# Altium PCB Product_Sorter.PcbDoc
Units mm, origin at the board's own origin, x right, y up, seen from the top; angles counter-clockwise.
Board outline 134 x 92 mm, 2 copper layers (Top Layer, Bottom Layer); 52 components, 48 nets, 220 pads, 87 vias.
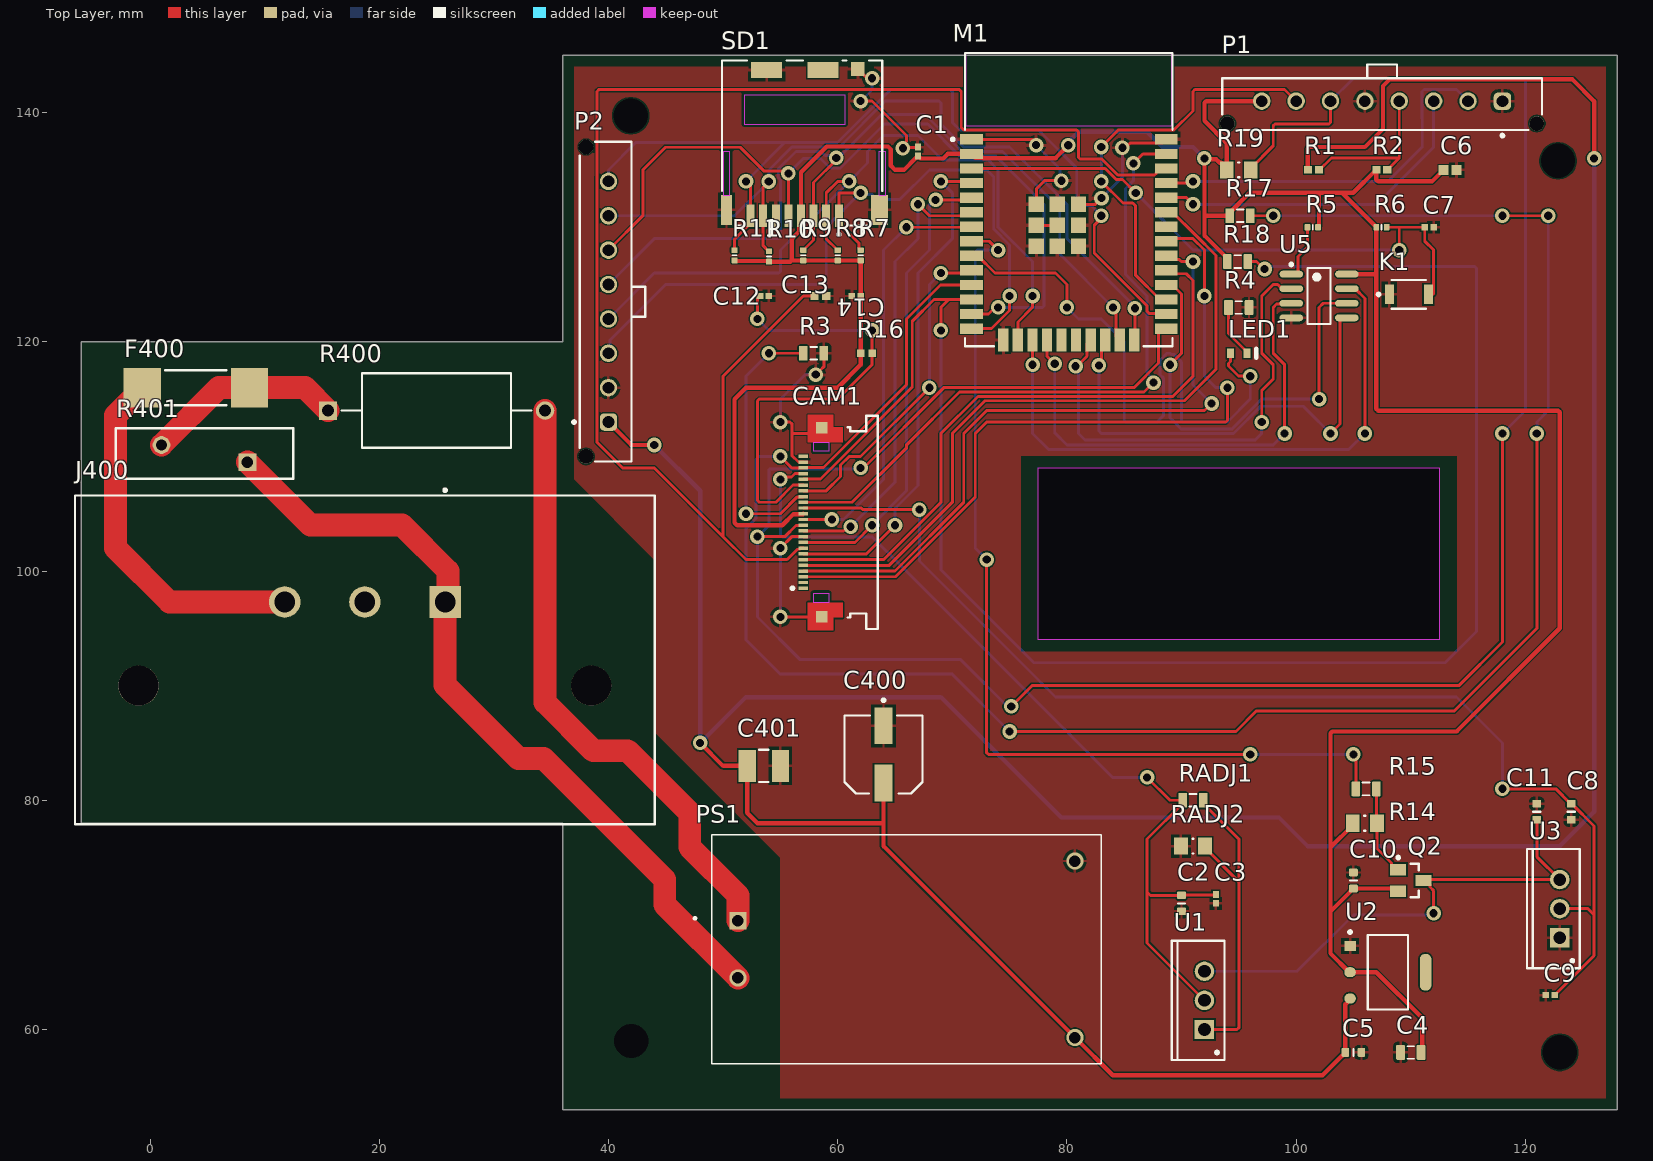
[diagram p0: Top Layer view]
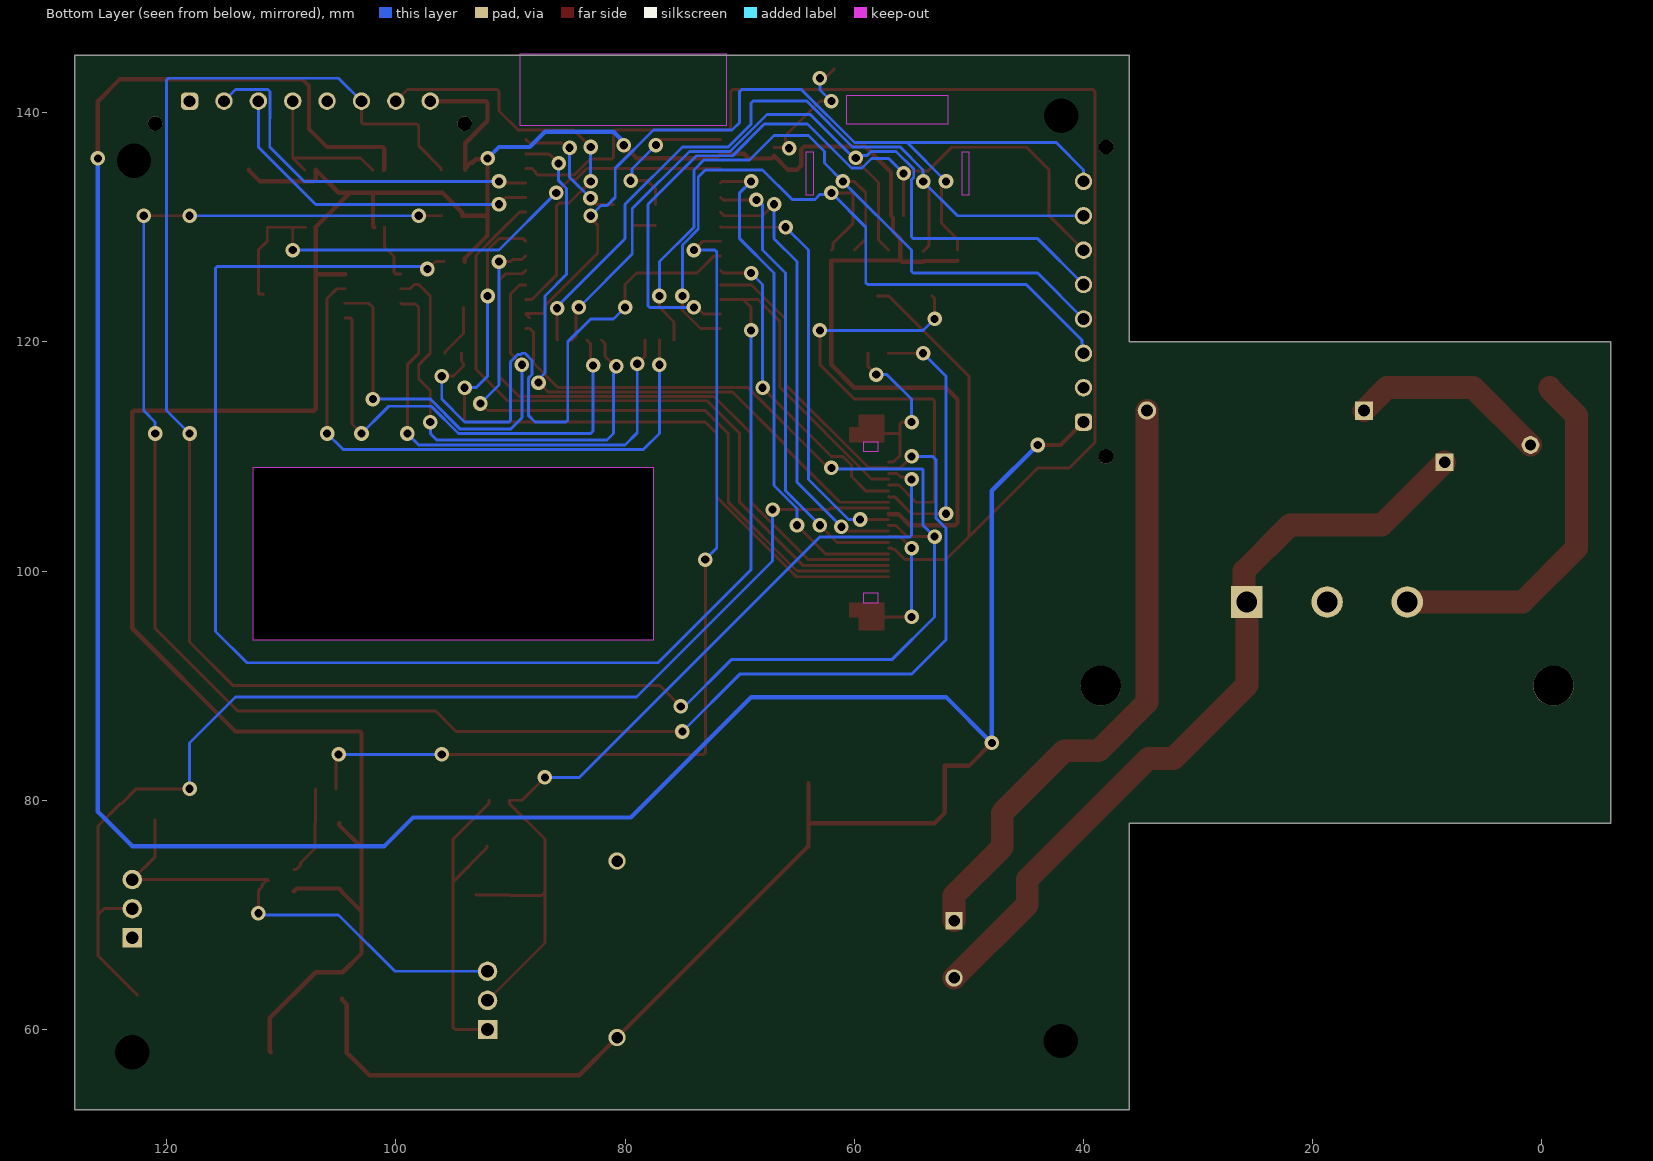
[diagram p1: Bottom Layer view, seen from below]
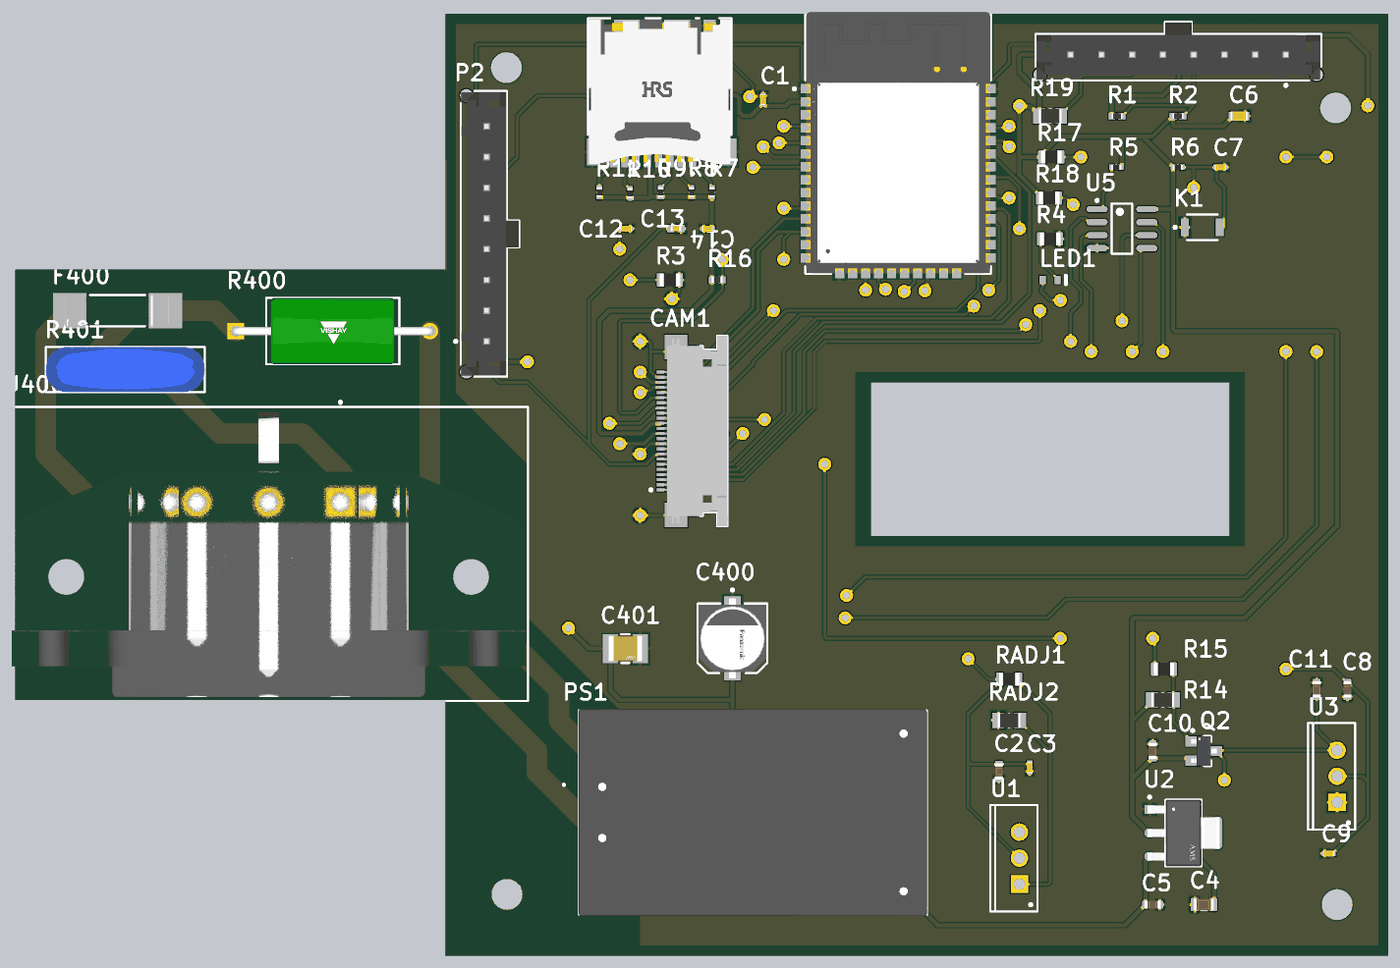
[diagram p2: 3D render of the assembled board from above, using the file's embedded part models]

## Layer stack, top to bottom
Top Solder: solder mask 0.0102, Solder Resist, Dk 3.5
Top Layer: signal copper 0.0356
Dielectric 1: dielectric 0.32, FR-4, Dk 4.8
Bottom Layer: signal copper 0.0356
Bottom Solder: solder mask 0.0102, Solder Resist, Dk 3.5

## Board outline
-6,120 -6,78 36,78 36,53 128,53 128,145 36,145 36,120
cut-out: 77.5,109 112.5,109 112.5,94 77.5,94

## Design rules (kind name [scope] priority, off if disabled: settings)
Clearance Clearance_1 [OnMid vs OnMid] p1: gap=0.127 ignorepadtopadclearanceinfootprint=FALSE sourcerule=37 cellrowname=All cellrowtype=0 cellcolname=All cellcoltype=0 innerlayers=TRUE
Clearance Clearance_2 [(ExistsOnLayer('Top Layer') Or ExistsOnLayer('Bottom Layer')) vs (ExistsOnLayer('Top Layer') Or ExistsOnLayer('Bottom Layer'))] p2: gap=0.127 ignorepadtopadclearanceinfootprint=FALSE sourcerule=37 cellrowname=All cellrowtype=0 cellcolname=All cellcoltype=0 outerlayers=TRUE
Clearance [All] p3: gap=0.254 ignorepadtopadclearanceinfootprint=FALSE ismatrix=TRUE
PolygonConnect [All] p1: connectstyle=Relief reliefconductorwidth=0.254 reliefentries=4 polygonreliefangle="90 Angle" airgapwidth=0.254
RoutingVias [All] p1: holewidth=0.711 width=1.27 viastyle="Through Hole" minholewidth=0.711 minwidth=1.27 maxholewidth=0.711 maxwidth=1.27
SMDNeckDown [All] p1: percent=50.000
SolderMaskExpansion [All] p1: expansion=0.102 istentingtop=FALSE
Width [All] p1: maxlimit=3 minlimit=0.254 preferedwidth=0.254 minimp=50.000000 maximp=50.000000 favimp=50.000000
30 further rules are at their usual default settings.

## Classes and differential pairs
component class U_Ram: C6 C? R5 R? U5
component class "U_power supply": C2 C3 C4 C5 C8 C9 C10 C11 C400 C401 F400 J400 PS1 Q2 R14 R15 R400 R401 RADJ1 RADJ2 U1 U2 U3
component class U_ESP32-Cam: C1 C7 C12 C13 C14 CAM1 K1 K? LED1 M1 P1 P2 R1 R2 R3 R4 R6 R7 R8 R9 R10 R11 R16 R17 R18 R19 SD1

## Components (designator, comment, footprint, x,y, rotation, side; value= is the part's Value field where it differs from the comment)
C1 "Capacitor 0.1 uF +/- 5% 16 V 0402" CAPC1005X56X25LL10T15 67,136.61 r90 top value=100nF
C2 "Capacitor 10µF +/-20% 10V 0603" CAPC0603(1608)100_L 90,71 r270 top value=10µF
C3 "Capacitor 0.1 uF +/- 5% 16 V 0402" CAPC1005X56X25LL10T15 93,71.39 r270 top value=100nF
C4 "Capacitor 100µF +/-20% 6.3V 0805" CAPC0805(2012)145_L 110,58 r180 top value=100µF
C5 "Capacitor 10µF +/-20% 10V 0603" CAPC0603(1608)100_L 105,58 r0 top value=10µF
C6 "Capacitor 1 uF +/- 10% 25 V 0603" CAPC1608X90X40LL10T20 113.425,135 r0 top value=1µF
C7 "Capacitor 0.1 uF +/- 5% 16 V 0402" CAPC1005X56X25LL10T15 111.61,130 r0 top value=100nF
C8 "Capacitor 10µF +/-20% 10V 0603" CAPC0603(1608)100_L 124,79 r270 top value=10µF
C9 "Capacitor 0.1 uF +/- 5% 16 V 0402" CAPC1005X56X25LL10T15 122.17,63 r180 top value=100nF
C10 "Capacitor 10µF +/-20% 10V 0603" CAPC0603(1608)100_L 105,73 r270 top value=10µF
C11 "Capacitor 10µF +/-20% 10V 0603" CAPC0603(1608)100_L 121,79 r90 top value=10µF
C12 "Capacitor 0.1 uF +/- 5% 16 V 0402" CAPC1005X56X25LL10T15 53.61,124 r0 top value=100nF
C13 "Capacitor 10 pF +/- 5% 50 V 0402" CAPC1005X55X25ML05T05 58.49,124 r0 top value=10pF
C14 "Capacitor 0.1 uF +/- 5% 16 V 0402" CAPC1005X56X25LL10T15 61.61,124 r180 top value=100nF
C400 "EEE-FK1A151P" FP-FKD-MFG 64,84 r270 top
C401 "12101C105KAZ2A" FP-1210-L_3_3_0_4-W_2_5_0-IPC_B 53.55,83 r0 top
CAM1 "52435-2471" MOLX-52435-2471 57.762,104.25 r90 top
F400 "0456030.ER" FP-0456-MFG 4,116 r0 top value=0.00132Ω
J400 "703W-00/52" FP-703W-00-52-MFG 18.75,92.25 r0 top
K1 "B3U-1000P" OMRON-B3U-1000_V 109.837,124.137 r0 top
LED1 "TLMS1100-GS08" VISH-TLMX1100_V 95,119 r0 top
M1 "ESP32-WROOM-32" FP-ESP32-WROOM-32-MFG 80.165,132.405 r0 top
P1 "66200811122" 66200811122 107.5,140.745 r0 top
P2 "66200811122" 66200811122 39.745,123.5 r270 top
PS1 "HLK-PM01" CONV_HLK-PM01 66,67 r0 top
Q2 "FDN340P" FAIR-SSOT3L-3_V 110,73 r0 top
R1 "Resistor 0R 0402 63 mW" RESC1005X40X25ML05T10 101.525,135 r0 top value=0R
R2 "Resistor 0R 0402 63 mW" RESC1005X40X25ML05T10 107.475,135 r0 top value=0R
R3 "Resistor 1K +/-5% 0805 125 mW" RESC0805(2012)_L 57.9,119 r0 top value=1k
R4 "Resistor 1K +/-5% 0805 125 mW" RESC0805(2012)_L 95,123 r0 top value=1k
R5 "Resistor 10K  +/-1 % 0402 63 mW" RESC0402(1005)_L 101.45,130 r180 top value=10k
R6 "Resistor 10K  +/-1 % 0402 63 mW" RESC0402(1005)_L 107.45,130 r0 top value=10k
R7 "Resistor 47K5 +/-1 % 0402 63 mW" RESC0402(1005)_L 62,127.55 r90 top value=47.5k
R8 "Resistor 47K5 +/-1 % 0402 63 mW" RESC0402(1005)_L 60,127.55 r90 top value=47.5k
R9 "Resistor 47K5 +/-1 % 0402 63 mW" RESC0402(1005)_L 57,127.55 r90 top value=47.5k
R10 "Resistor 47K5 +/-1 % 0402 63 mW" RESC0402(1005)_L 54,127.45 r90 top value=47.5k
R11 "Resistor 47K5 +/-1 % 0402 63 mW" RESC0402(1005)_L 51,127.55 r90 top value=47.5k
R14 "Resistor 10k +/-1% 0805 125 mW" RESC2013X50X35ML15T15 106,78 r0 top value=10k
R15 "Resistor 1K +/-5% 0805 125 mW" RESC0805(2012)_L 106.1,81 r180 top value=1k
R16 "Resistor 4k7 +/-1% 0402 100 mW" RESC1005X40X25ML05T05 62.5,119 r0 top value=4.7k
R17 "Resistor 4R7  +/-5 % 0805 125 mW" RESC0805(2012)_L 95.11,131 r0 top value=4.7
R18 "Resistor 4R7  +/-5 % 0805 125 mW" RESC0805(2012)_L 94.9,127 r0 top value=4.7
R19 "Resistor 10k +/-1% 0805 125 mW" RESC2013X50X35ML15T15 95,135 r0 top value=10k
R400 "RWM04103R90JR15E1" FP-RWM0410-MFG 25,114 r0 top
R401 "B72214S0300K101" FP-B72214S0300K101-MFG 4.75,110.25 r180 top value=4950pF
RADJ1 "Resistor 1K +/-5% 0805 125 mW" RESC0805(2012)_L 91,80 r0 top value=8K
RADJ2 "Resistor 10k +/-1% 0805 125 mW" RESC2013X50X35ML15T15 91,76 r0 top value=10k
SD1 "DM3CS-SF" FP-DM3CS-SF-MFG 56.9,137.35 r0 top
U1 "LM317T" TO-220 92,62.54 r90 top
U2 "AMS1117-3.3" FP-AMS1117-IPC_C 108,65 r0 top
U3 "LM317T" TO-220 123,70.54 r90 top
U5 "23LC512-I/SN" MCHP-SOIC-SN8_N 102,124 r0 top

## Footprints (in the part's own frame and the unit in brackets; to place one, negate y for a bottom-side part, rotate by r counter-clockwise, add the part's x,y. Pads: shape width x height; smd on the part's side, far side on the other; paste and mask are expansions set on the pad)
66200811122 [mm] "3.00mm Male Single Row Vertical Header, 8p"
  rrect50% 1.52x1.52 hole 1.02: 1(10.5,0.255)
  round 1.52 hole 1.02: 2(7.5,0.255) 3(4.5,0.255) 4(1.5,0.255) 5(-1.5,0.255) 6(-4.5,0.255) 7(-7.5,0.255) 8(-10.5,0.255)
  round 1.27 hole 1.27 unplated: MH1(-13.5,-1.705) MH2(13.5,-1.705)
  silkscreen extent -13.95,-2.87 13.95,3.46, body extent -13.82,-2.19 13.83,3.38, height 9.93
CAPC0603(1608)100_L [mm] "Chip Capacitor, Body 1.6x0.8mm, Height 1.0mm, IPC High Density"
  rrect25% 0.66x0.76 smd: 1(-0.7,0) 2(0.7,0)
  silkscreen extent 0,-0.3 0,0.3, body extent -0.8,-0.4 0.8,0.4, height 0.95
CAPC0805(2012)145_L [mm] "Chip Capacitor, Body 2.0x1.2mm, Height 1.45mm, IPC High Density"
  rrect25% 0.76x1.3 smd: 1(-0.9,0) 2(0.89,0)
  silkscreen extent -0.3,-0.55 0.3,0.55, body extent -1,-0.6 1,0.6, height 1.45
CAPC1005X55X25ML05T05 [mm] "Chip Capacitor, 2-Leads, Body 1.05x0.55mm, IPC Low Density"
  rect 0.72x0.72 smd: 1(-0.51,0) 2(0.51,0)
  body extent -0.53,-0.28 0.53,0.28, height 0.55
CAPC1005X56X25LL10T15 [mm] "Chip Capacitor, 2-Leads, Body 1.10x0.60mm, IPC High Density"
  rect 0.58x0.54 smd: 1(-0.39,0) 2(0.39,0)
  body extent -0.55,-0.3 0.55,0.3, height 0.56
CAPC1608X90X40LL10T20 [mm] "Chip Capacitor, 2-Leads, Body 1.70x0.90mm, IPC High Density"
  rect 0.85x0.85 smd: 1(-0.575,0) 2(0.575,0)
  body extent -0.85,-0.45 0.85,0.45, height 0.9
CONV_HLK-PM01 [mm]
  rect 1.508x1.508 / inner round 1.508 / far side rect 1.508x1.508 hole 1: 1(-14.7,2.5)
  round 1.508 hole 1: 2(-14.7,-2.5) 3(14.7,7.7) 4(14.7,-7.7)
  silkscreen extent -18.55,-10 17,10, body extent -17,-10.1 17,10.1, height 15
FAIR-SSOT3L-3_V [mm] "SOT23, 3-Leads, Body 2.92x1.4mm, Pitch 0.95mm"
  rect 1.4x1 smd: 1(-1.1,0.95) 2(-1.1,-0.95) 3(1.1,0)
  silkscreen extent -1.22,-1.46 0.7,2.12, body extent -1.26,-1.46 1.26,1.46, height 1.12
FP-0456-MFG [mm]
  rect 3.25x3.43 smd paste+0 mask+0: 1(-4.675,0) 2(4.675,0)
  silkscreen extent -2.67,-1.52 2.68,1.52, body extent -6.4,-1.82 6.4,1.82, height 0.25
FP-703W-00-52-MFG [mm]
  rect 2.75x2.75 hole 1.8 paste-2539.97 mask+0: 1(7,5.05)
  round 2.75 hole 1.8 paste-2539.97 mask+0: 2(0,5.05) 3(-7,5.05)
  round 3.5 hole 3.5 unplated paste-2539.97 mask+0: ""(-19.75,-2.25) ""(19.75,-2.25)
  silkscreen extent -25.3,-14.35 25.3,14.92, body extent -25.4,-14.45 25.4,14.45, height 0.25
FP-1210-L_3_3_0_4-W_2_5_0-IPC_B [mm]
  rect 1.503x2.804 smd paste+0 mask+0: 1(-1.45,0) 2(1.45,0)
  silkscreen extent -0.4,-1.4 0.4,1.4, body extent -2.45,-1.65 2.45,1.65, height 0.25
FP-AMS1117-IPC_C [mm]
  rect 1.004x0.872 smd paste+0 mask+0: 1(-3.295,2.29)
  rrect100% 1.004x0.872 smd paste+0 mask+0: 2(-3.295,0) 3(-3.295,-2.29)
  rrect87% 1.004x3.182 smd paste+0 mask+0: 4(3.295,0)
  silkscreen extent -3.42,-3.25 1.75,3.62, body extent -3.9,-3.35 3.9,3.35, height 0.25
FP-B72214S0300K101-MFG [mm]
  rect 1.55x1.55 hole 1 paste-2539.97 mask+0: 1(-3.75,0.75)
  round 1.55 hole 1 paste-2539.97 mask+0: 2(3.75,-0.75)
  silkscreen extent -7.75,-2.2 7.75,2.2, body extent -7.85,-2.3 7.85,2.3, height 0.25
FP-DM3CS-SF-MFG [mm]
  rect 0.7x2 smd paste+0 mask+0: 1(3.2,-6.35) 2(2.1,-6.35) 3(1,-6.35) 4(-0.1,-6.35) 5(-1.2,-6.35) 6(-2.3,-6.35) 7(-3.4,-6.35) 8(-4.5,-6.35)
  rect 2.7x1.4 smd paste+0 mask+0: 9(-3.1,6.35) 10(1.8,6.35)
  rect 1.2x1.2 smd paste+0 mask+0: 11(4.85,6.45)
  rect 1x2.6 smd paste+0 mask+0: 12(-6.6,-5.85)
  rect 1.5x2.6 smd paste+0 mask+0: 13(6.75,-5.85)
  Keep-Out Layer region: -5.05,1.65 3.75,1.65 3.75,4.15 -5.05,4.15
  Keep-Out Layer region: 6.7,-4.55 7.3,-4.55 7.3,-0.75 6.7,-0.75
  Keep-Out Layer region: -6.9,-4.55 -6.3,-4.55 -6.3,-0.75 -6.9,-0.75
  silkscreen extent -7,-8.1 7,7.2, body extent -7.2,-7.45 7.6,7.3, height 0.25
FP-ESP32-WROOM-32-MFG [mm]
  rect 2x0.9 smd paste+0 mask+0: 1(-8.5,5.26) 2(-8.5,3.99) 3(-8.5,2.72) 4(-8.5,1.45) 5(-8.5,0.18) 6(-8.5,-1.09) 7(-8.5,-2.36) 8(-8.5,-3.63) 9(-8.5,-4.9) 10(-8.5,-6.17) 11(-8.5,-7.44) 12(-8.5,-8.71) 13(-8.5,-9.98) 14(-8.5,-11.25) 25(8.5,-11.25) 26(8.5,-9.98) 27(8.5,-8.71) 28(8.5,-7.44) 29(8.5,-6.17) 30(8.5,-4.9) 31(8.5,-3.63) 32(8.5,-2.36) 33(8.5,-1.09) 34(8.5,0.18) 35(8.5,1.45) 36(8.5,2.72) 37(8.5,3.99) 38(8.5,5.26)
  rect 0.9x2 smd paste+0 mask+0: 15(-5.715,-12.25) 16(-4.445,-12.25) 17(-3.175,-12.25) 18(-1.905,-12.25) 19(-0.635,-12.25) 20(0.635,-12.25) 21(1.905,-12.25) 22(3.175,-12.25) 23(4.445,-12.25) 24(5.715,-12.25)
  rect 1.33x1.33 smd paste+0 mask+0: 39(-2.835,-4.075) 39(-2.835,-2.24) 39(-2.835,-0.405) 39(-1,-4.075) 39(-1,-2.24) 39(-1,-0.405) 39(0.835,-4.075) 39(0.835,-2.24) 39(0.835,-0.405)
  Keep-Out Layer region: -9,6.45 9,6.45 9,12.75 -9,12.75
  Keep-Out Layer region: -9,6.45 9,6.45 9,12.75 -9,12.75
  silkscreen extent -10.25,-12.8 9.05,12.8, body extent -9.6,-13.35 9.6,12.9, height 0.25
FP-FKD-MFG [mm]
  rect 3.2x1.6 smd paste+0 mask+0: 1(-2.5,0) 2(2.5,0)
  silkscreen extent -4.85,-3.4 3.4,3.4, body extent -4.35,-3.65 4.35,3.65, height 0.25
FP-RWM0410-MFG [mm]
  rect 1.6x1.6 hole 1.05 paste-2539.97 mask+0: 1(-9.47,0)
  round 1.6 hole 1.05 paste-2539.97 mask+0: 2(9.47,0)
  silkscreen extent -8.27,-3.25 8.27,3.25, body extent -10.37,-3.35 10.37,3.35, height 0.25
MCHP-SOIC-SN8_N [mm] "SOIC, 8-Leads, Body 4.9x3.9mm, Pitch 1.27mm, IPC Medium Density"
  oval 2.05x0.6 smd: 1(-2.425,1.905) 2(-2.425,0.635) 3(-2.425,-0.635) 4(-2.425,-1.905) 5(2.425,-1.905) 6(2.425,-0.635) 7(2.425,0.635) 8(2.425,1.905)
  silkscreen extent -2.55,-2.45 1,2.88, body extent -1.95,-2.45 1.95,2.45, height 1.75
MOLX-52435-2471 [mm] "FPC Connector, 24-Leads, Right Angle, Pitch 0.5 mm, Mated Height 2.0 mm, SMT"
  rect 0.3x0.8 smd: 1(-5.75,0.762) 2(-5.25,0.762) 3(-4.75,0.762) 4(-4.25,0.762) 5(-3.75,0.762) 6(-3.25,0.762) 7(-2.75,0.762) 8(-2.25,0.762) 9(-1.75,0.762) 10(-1.25,0.762) 11(-0.75,0.762) 12(-0.25,0.762) 13(0.25,0.762) 14(0.75,0.762) 15(1.25,0.762) 16(1.75,0.762) 17(2.25,0.762) 18(2.75,0.762) 19(3.25,0.762) 20(3.75,0.762) 21(4.25,0.762) 22(4.75,0.762) 23(5.25,0.762) 24(5.75,0.762)
  rect 1x1 smd: MP1(-8.25,-0.863) MP2(8.25,-0.863)
  Top Layer region: 7,0.362 9.4,0.362 9.4,-1.838 8.3,-1.838 8.3,-2.688 7,-2.688
  Top Layer region: -7,0.362 -9.4,0.362 -9.4,-1.838 -8.3,-1.838 -8.3,-2.688 -7,-2.688
  Keep-Out Layer region: 6.2,-0.137 7,-0.137 7,-1.438 6.2,-1.438
  Keep-Out Layer region: -7,-0.137 -6.2,-0.137 -6.2,-1.438 -7,-1.438
  silkscreen extent -9.3,-5.74 9.3,1.84, body extent -9.3,-5.74 9.3,0.86, height 2.05
OMRON-B3U-1000_V [mm] "SMD, 2-Leads, Body 3x2.5mm"
  rect 0.8x1.7 smd: 1(-1.7,0) 2(1.7,0)
  silkscreen extent -2.77,-1.25 1.5,1.25, body extent -1.5,-1.25 1.5,1.25, height 1.75
RESC0402(1005)_L [mm] "Chip Resistor, Body 1.0x0.5mm, IPC High Density"
  rrect25% 0.5x0.55 smd: 1(-0.45,0) 2(0.45,0)
  silkscreen extent 0,-0.2 0,0.2, body extent -0.5,-0.25 0.5,0.25, height 0.3
RESC0805(2012)_L [mm] "Chip Resistor, Body 2.0x1.3mm, IPC High Density"
  rrect25% 0.76x1.3 smd: 1(-0.9,0) 2(0.89,0)
  silkscreen extent -0.3,-0.55 0.3,0.55, body extent -1,-0.62 1,0.63, height 0.6
RESC1005X40X25ML05T05 [mm] "Chip Resistor, 2-Leads, Body 1.05x0.55mm, IPC Low Density"
  rect 0.65x0.65 smd: 1(-0.5,0) 2(0.5,0)
  body extent -0.53,-0.28 0.53,0.28, height 0.4
RESC1005X40X25ML05T10 [mm] "Chip Resistor, 2-Leads, Body 1.05x0.55mm, IPC Low Density"
  rect 0.7x0.65 smd: 1(-0.475,0) 2(0.475,0)
  body extent -0.53,-0.28 0.53,0.28, height 0.4
RESC2013X50X35ML15T15 [mm] "Chip Resistor, 2-Leads, Body 2.2x1.4mm, IPC Low Density"
  rect 1.2x1.5 smd: 1(-1.05,0) 2(1.05,0)
  silkscreen extent -0.05,-0.65 0.05,0.65, body extent -1.1,-0.7 1.1,0.7, height 0.5
TO-220 [mm] "TO, Thru-Hole, Vertical, Heatsink Mounted; 3 In-Line Leads; Pitch 2.54 mm"
  rect 1.7x1.7 hole 1.1: 1(-2.54,0)
  round 1.7 hole 1.1: 2(0,0) 3(2.54,0)
  silkscreen extent -5.2,-1.75 5.2,2.85, body extent -5.25,-1.8 5.25,2.9, height 19.7
VISH-TLMX1100_V [mm] "SMD, 2-Leads, Body 1.6x0.8mm"
  rect 0.6x0.8 smd: 1(-0.725,0) 2(0.725,0)
  silkscreen extent 1.52,-0.4 1.52,0.4, body extent -0.8,-0.4 0.8,0.4, height 0.65

## Part data
C1 C3 C7 C9 C12 C14: library part CMP-001-00001-6, "Chip Capacitor, 0.1 uF, +/- 5%, 16 V, 0402 (1005 Metric)", Capacitor Type=Ceramic, Case/Package=0402, Max Operating Temperature=125°C, Min Operating Temperature=-55°C, Tolerance=5%, Voltage Rating=16V, Mounting Technology=SM, Pins=2, RoHS Compliant=True
C2 C5 C8 C10 C11: library part CMP-001-00075-4, "Chip Capacitor, 10µF +/-20%, 10V, 0603, Thickness 1 mm", Case/Package=0603, Max Operating Temperature=85°C, Min Operating Temperature=-55°C, Tolerance=10%, Voltage Rating=10V, Mounting Technology=SMT, Pins=2
C4: library part CMP-001-00054-4, "Chip Capacitor, 100µF +/-20%, 6.3V, 0805, Thickness 1.45 mm", Case/Package=0805, Max Operating Temperature=85°C, Min Operating Temperature=-55°C, Tolerance=10%, Voltage Rating=6.3V, Mounting Technology=SMT, Pins=2
C6: library part CMP-001-00005-6, "Chip Capacitor, 1 uF, +/- 10%, 25 V, 0603 (1608 Metric)", Capacitor Type=Ceramic, Case/Package=0603, Max Operating Temperature=125°C, Min Operating Temperature=-55°C, Tolerance=10%, Voltage Rating=25V, Mounting Technology=SM, Pins=2, RoHS Compliant=True
C13: library part CMP-001-00013-6, "Chip Capacitor, 10 pF, +/- 5%, 50 V, 0402 (1005 Metric)", Capacitor Type=Ceramic, Case/Package=0402, Max Operating Temperature=125°C, Min Operating Temperature=-55°C, Tolerance=5%, Voltage Rating=50V, Mounting Technology=SM, Pins=2, RoHS Compliant=True
C400: library part CMP-05427-002136-1, "CAP ALUM 150UF 20% 10V SMD", Capacitance=150uF, Case/Package=Radial, ESR (Equivalent Series Resistance)=360mR, Leakage Current=3uA, Max Operating Temperature=105°C, Min Operating Temperature=-55°C, Package Quantity=1000, Ratings=AEC-Q200, Ripple Current=240mA, Tolerance=20%, Voltage=10V, Construction=Cylindrical, Contact Plating=Tin, Diameter=6.3mm, Height=5.8mm, Height - Seated (Max)=0.24inch, Impedance=360mR, Lead Diameter=0.65mm, Lead Free="Lead Free", Lead Pitch=1.8mm, Length=5.8mm, Life (Hours)=2000Hour, Mount="Surface Mount", Number of Pins=2, Packaging="Tape and Reel", Polarity=Polar, Radiation Hardening=No, Reach SVHC Compliant=Yes, Ripple Current (AC)=240mA, RoHS Compliant=Yes, Series=FK, Size=5.8mm, Termination=SMD/SMT, Voltage Rating=10V, Voltage Rating (DC)=10V, Width=7.8mm
C401: library part CMP-04427-007938-1, "General Purpose Ceramic Capacitor, 1210, 1uF, 10%, X7R, 15%, 100V", Capacitance=1uF, Case Code (Imperial)=1210, Case Code (Metric)=3225, Dielectric=X7R, Dielectric Material=Ceramic, Max Operating Temperature=125°C, Min Operating Temperature=-55°C, Package Quantity=1, Tolerance=10%, Voltage=100V, Case/Package=1210, Construction=Flat, Contact Plating=Tin, Depth=2.5mm, Dissipation Factor=2.5%, Features="Soft Termination", Height=2.79mm, Lead Free="Lead Free", Length=3.2mm, Mount="Surface Mount", Packaging="Tape and Reel", Radiation Hardening=No, REACH SVHC="No SVHC", RoHS Compliant=Yes, Series=FLEXITERM®, Termination=SMD/SMT, Thickness=0.11inch, Voltage Rating=100V, Voltage Rating (DC)=100V, Width=2.5mm
CAM1: library part CMP-1241-00275-1, "0.5 mm Pitch Easy-On(TM) Type FPC Connector, 2.0 mm Mated Height, Right Angle, ZIF, SMT, Top Contact, 24 Circuits, -40 to 85 degC, ELV and RoHS Compliant, Tape and Reel", Current (Max per Contact)=0.5A, Manufacturer=Molex, Voltage (Max)="50V AC (RMS)/DC", Circuits (Loaded)=24, ComponentLink1Description="Manufacturer URL", ComponentLink1URL=http://www.molex.com/molex/index.jsp, ComponentLink2Description=Datasheet, ComponentLink2URL=http://www.molex.com/webdocs/datasheets/pdf/en-us/0524352471_FFC_FPC_CONNECTORS.pdf, ComponentLink3Description="Package Specification", ComponentLink3URL=http://www.molex.com/pdm_docs/sd/524352471_sd.pdf, Contact Position=Top, Durability (mating cycles max)=20, Entry Angle="90degrees Angle", Mated Height=2.00mm, Material - Metal="Phosphor Bronze", Material - Plating Mating=Gold, Material - Plating Termination=Gold, Mounting Technology="Surface Mount", Number of Rows=1, Orientation="Right Angle", PackageDescription="24-Lead FPC Connector, Pitch 0.5 mm", PackageReference=52435-2471, PackageVersion="Rev. D, 07/2010", Packing="Tape and Reel", PartNumber=52435-2471, PCB Locator=No, PCB Retention=Yes, Pitch - Mating Interface=0.50mm, Polarized to PCB=Yes, RoHS=TRUE, Stackable=No
F400: library part CMP-2000-05709-2, "FUSE BOARD MNT 30A 125VAC 72VDC", Fuse Current=30A, Fuse Interrupt Ac Current=300A, Fuse Interrupt Dc Current=1000A, Fuse Voltage Drop=69.9mV, Manufacturer=Littelfuse, Max Fuse Ac Voltage=125V, Max Fuse Dc Voltage=72V, Package=0456, Resistance=0.00132Ω, Temperature="-55°C to +125°C", Temperature Range High=+125°C, Temperature Range Low=-55°C, Automotive=No, Category=Fuse, ComponentLink2Description=Datasheet, ComponentLink2URL=https://www.littelfuse.com/~/media/electronics/datasheets/fuses/littelfuse_fuse_456_datasheet.pdf.pdf, Device Class L1="Circuit Protection", Device Class L2=Fuses, Device Class L3=unset, Digikey Description="FUSE BOARD MNT 30A 125VAC 72VDC", Fuse Blow Speed=Fast, Fuse I2T=81A2Sec, Height=3.05mm, Ipc Land Pattern Name=CAPC1008305X305, Lead Free=Yes, Manufacturer Part Number=0456030.ER, Mouser Description="456 Series Fast-Acting 125 V 30 A 10.10 x 3.05 mm NANO2® SMT Ceramic Fuse", Octopart=https://octopart.com/0456030.er-littelfuse-7502597, RoHS=TRUE, Voltage Rating=125V
J400: library part CMP-64678-000001-1, "PWR ENT RCPT IEC320-C14 PNL SLDR", Color=Black, Current=15A, Max Voltage Rating (AC)=250V, Package Quantity=100, Approvals=UL, Connector Type=Receptacle, Contact Plating=Tin, Current Rating=15A, Fuse=No, Gender=Receptacle, Housing Material=Thermoplastic, Lead Free="Lead Free", Max Current Rating=15A, Mount="Through Hole", Number of Contacts=3, Number of Poles=2, Number of Positions=3, Orientation="Right Angle", Packaging=Bulk, Panel Thickness=0.12inch, Pitch=7mm, REACH SVHC="No SVHC", Termination=Solder, Voltage Rating=250V, Voltage Rating (AC)=250V, Voltage Rating (DC)=250V
K1: library part CMP-011-00000-2, "Tactile Switch, SPST-NO, 0.05 A, 12 V, -25 to 70 degC, 2-Pin SMD, RoHS, Tape and Reel", Case/Package=B3U-1000, Contact Current Rating=50mA, IP Rating=IP40, Manufacturer="Omron Electronic Components", Max Contact Resistance=100mohm, Max Operating Temperature=70°C, Max Voltage Rating (DC)=12V, Min Operating Temperature=-25°C, Operating Force=153gf, Package Description="2-Pin Surface Mount Device, Body 3 x 2.5 mm", Package Quantity=3500, Resistance=0.1Ohm, Contact Material=Silver, Current Rating=50mA, Datasheet URL=http://www.omron.com/ecb/products/pdf/en-b3u.pdf, Datasheet Version=Jan-15, Manufacturer URL=http://www.omron.com/, Max Current Rating=50mA, Mounting Technology=SM, Package Reference=B3U-1000, Packaging=TapeandReel, RoHS Compliant=True, Throw Configuration=SPST, Voltage Rating=12V, Voltage Rating (DC)=12V
LED1: library part CMP-007-00030-2, "Red Led, 20mA, 2.1 V, -40 to 100 degC, 2-Pin SMD (0603), RoHS, Tape and Reel", Case/Package=0603, Colour=Red, Forward Current=20mA, Forward Voltage=2.1V, Manufacturer="Vishay Semiconductor", Max Operating Temperature=100°C, Min Operating Temperature=-40°C, Package Description="2-Pin Surface Mount Device, Body 1.6 x 0.8 mm", Package Quantity=3000, Package Reference=TLMX1100, Power=90mW, Datasheet URL=http://www.vishay.com/docs/83173/tlmb1100.pdf, Datasheet Version="Rev. 2.7, 03/2016", Illumination Colour=Red, Lens Style=Clear, Luminous Intensity=63mcd, Manufacturer URL=http://www.vishay.com/, Mounting Technology=SM, Nominal Vf=2.1V, Packaging=TapeandReel, Pins=2, RoHS Compliant=True, Viewing Angle=160degrees
M1: library part CMP-194065-000008-1, "RX TXRX MOD WIFI SURFACE MOUNT", Case/Package=SMD/SMT, Frequency=2.5GHz, Max Operating Temperature=85°C, Min Operating Temperature=-40°C, Operating Supply Voltage=3.6V, Package Quantity=550, Data Rate=150Mbps, Mount="Surface Mount", Packaging="Cut Tape", Sensitivity=-98dBm, Weight=0.088185oz
P1 P2: library part CMP-1502-00446-2, Color=Black, Contact Resistance=10mΩ, Current Rating=5A, Insulation Resistance=1GΩ, Max Operating Temperature=105°C, Min Operating Temperature=-40°C, Operating Supply Voltage=250V, Connector Type="Male Pin, Socket", Contact Material=Copper, Contact Plating=Tin, Fastening Type=Ramp, Gender=Male, Height=11mm, Lead Pitch=3mm, Length=27.65mm, Mount="Through Hole", NexarPartId=23024701, Number of Contacts=8, Number of Pins=8, Number of Positions=8, Number of Rows=1, Orientation=Vertical, Pitch=3mm, REACH SVHC=Unknown, RoHS=Compliant, Termination="Kinked Pin", Width=27.65mm
PS1: "The HLK-PM01 is a small size low cost AC to DC converter which can take in 110V/220V AC at 50/60 Hz and give 5V 3W output. The module is can be used in designs which run on 5V and needs to be powered form the AC mains.", Package=None, Availability="Not in stock", Check_prices=https://www.snapeda.com/parts/hlk-pm01/Hi-link/view-part/?ref=eda, MF=Hi-link, MP=hlk-pm01, Price=None, SnapEDA_Link=https://www.snapeda.com/parts/hlk-pm01/Hi-link/view-part/?ref=snap
Q2: library part CMP-013-00016-4, "Single P-Channel, Logic Level, PowerTrench(R) MOSFET, 2 A, 20 V, -55 to 150 degC, 3-Pin SOT-23, RoHS, Tape and Reel", Case/Package=TO-236-3, Input Capacitance=779pF, Manufacturer="Fairchild Semiconductor", Max Operating Temperature=150°C, Min Operating Temperature=-55°C, Nominal Dual Supply Voltage=-20V, Package Description="3-Pin Small Outline Transistor, Body 2.92 x 1.4 mm, Pitch 0.95 mm", Package Quantity=3000, Package Reference=SSOT3L, Package Version="Rev. 3, 05/2015", Power=500mW, Datasheet URL=https://www.fairchildsemi.com/datasheets/FD/FDN340P.pdf, Datasheet Version="Rev. E1, 02/2007", Elements=1, Mounting Technology=SM, Nominal Vgs=-800mV, Packaging=TapeandReel, Pins=3, Rds On Max=70mohm, RoHS Compliant=True, Typical Rise Time=9ns
R1 R2: library part CMP-009-00004-5, "Chip Resistor, 0 Ohm, 0.063 W, -55 to 155 degC, 0402 (1005 Metric)", Case/Package=0402, Max Operating Temperature=155°C, Min Operating Temperature=-55°C, Power=63mW, Voltage Rating=50V, Mounting Technology=SM, Pins=2, RoHS Compliant=True
R3 R4 R15 RADJ1: library part CMP-009-00118-3, "Chip Resistor, 1 kOhms, +/-5%, 125 mW, -55 to 155 degC, 0805", Case/Package=0805, Max Operating Temperature=155°C, Min Operating Temperature=-55°C, Power=125mW, Tolerance=5%, Pins=2
R5 R6: library part CMP-009-00149-3, "Chip Resistor, 10 kOhms, +/-1 %, 63 mW, -55 to 125 degC, 0402", Case/Package=0402, Max Operating Temperature=155°C, Min Operating Temperature=-55°C, Power=63mW, Tolerance=1%, Pins=2
R7 R8 R9 R10 R11: library part CMP-009-00137-3, "Chip Resistor, 47,5 kOhms, +/-1 %, 63 mW, -55 to 155 degC, 0402", Case/Package=0402, Max Operating Temperature=155°C, Min Operating Temperature=-55°C, Power=63mW, Tolerance=1%, Pins=2
R14 R19 RADJ2: library part CMP-009-00018-5, "Chip Resistor, 10 KOhm, +/- 1%, 125 mW, -55 to 155 degC, 0805 (2012 Metric)", Case/Package=0805, Max Operating Temperature=155°C, Min Operating Temperature=-55°C, Power=125mW, Tolerance=1%, Voltage Rating=150V, Mounting Technology=SM, Pins=2, RoHS Compliant=True
R16: library part CMP-009-00030-5, "Chip Resistor, 4.7 KOhm, +/- 1%, 0.1 W, -55 to 155 degC, 0402 (1005 Metric)", Case/Package=0402, Max Operating Temperature=155°C, Min Operating Temperature=-55°C, Power=100mW, Tolerance=1%, Voltage Rating=50V, Mounting Technology=SM, Pins=2, RoHS Compliant=True
R17 R18: library part CMP-009-00174-3, "Chip Resistor, 4,7 Ohms, +/-5 %, 125 mW, -55 to 155 degC, 0805", Case/Package=0805, Max Operating Temperature=155°C, Min Operating Temperature=-55°C, Power=125mW, Tolerance=5%, Pins=2
R400: library part CMP-00030-42636952-1, "RWM04103R90JR15E1 Resistor; Wirewound; Res 3.9 Ohms; Pwr-Rtg 3 W; Tol 5%; Axial; Vitreous Enamel", Case/Package=Axial, Max Operating Temperature=350°C, Max Power Dissipation=3W, Min Operating Temperature=-55°C, Resistance=3.9Ω, Temperature Coefficient=75ppm/°C, Tolerance=5%, Voltage Rating=120V, Composition=Wirewound, Contact Plating="Copper, Silver, Tin", Diameter=5.5mm, Height=6.5mm, Lead Diameter=800µm, Length=12mm, Military Standard=Not, Mount="Through Hole", NexarPartId=42636952, Number of Terminations=2, Power Rating=3W, Radiation Hardening=No, REACH SVHC="No SVHC", RoHS=Compliant, Termination=Axial, Voltage Rating (AC)=120V, Voltage Rating (DC)=120V, Width=5.5mm
R401: library part CMP-10618-000011-1, "VARISTOR 47V 1KA DISC 14MM", Capacitance=4950pF, Clamping Current=10A, Clamping Voltage=93V, Manufacturer=EPCOS, Package=0, Temperature="-40°C to +105°C", Temperature Range High=+105°C, Temperature Range Low=-40°C, Varistor Voltage=47V, Voltage Rating Ac=30V, Voltage Rating Dc=38V, Voltage Tolerance=10%, Automotive=No, Category=Res, ComponentLink2Description=Datasheet, ComponentLink2URL=https://www.tdk-electronics.tdk.com/inf/70/db/var/SIOV_Leaded_StandarD.pdf, Device Class L1="Circuit Protection", Device Class L2=Varistors, Device Class L3=unset, Digikey Description="VARISTOR 47V 1KA DISC 14MM", Height=18.5mm, Lead Free=Yes, Manufacturer Part Number=B72214S0300K101, Mouser Description="Varistors 30volts 1000A", Octopart=https://octopart.com/b72214s0300k101-epcos-11931390, RoHS=TRUE
SD1: library part CMP-11597-000003-1, "CONN MICRO SD CARD HINGED TYPE", Contact Resistance=100mR, Current Rating=500mA, Flammability Rating="UL94 V-0", Insulation Resistance=1GR, Max Operating Temperature=85°C, Min Operating Temperature=-25°C, Package Quantity=1, Voltage Rating (AC)=125V, Connector Type=Connector, Contact Material=Gold, Contact Plating=Gold, Depth=1.83mm, Gender=Female, Housing Material=Polymer, Lead Free="Lead Free", Length=14.1mm, Max Current Rating=500mA, Mount="Surface Mount", Number of Contacts=8, Number of Positions=8, Number of Rows=1, Orientation="Right Angle", Packaging="Tape and Reel", Pitch=1.1mm, Radiation Hardening=No, Termination=Solder, Width=13.8mm
U1 U3: library part CMP-0244-00444-1, "1.5A, 1.2V to 37V Adjustable Voltage Regulator, 3-Pin TO-220", ComponentLink1Description="Manufacturer URL", ComponentLink1URL=http://www.st.com, ComponentLink2Description=Datasheet, ComponentLink2URL=http://www.st.com/internet/com/TECHNICAL_RESOURCES/TECHNICAL_LITERATURE/DATASHEET/CD00000455.pdf, ComponentLink3Description="Package Specification", ComponentLink3URL=http://www.st.com/internet/com/TECHNICAL_RESOURCES/TECHNICAL_LITERATURE/PACKAGE_INFORMATION/CD00004649.pdf, DatasheetVersion=1/11/2011, PackageDescription="TO, Thru-Hole, Vertical, Heatsink Mounted; 3 In-Line Leads; Pitch 2.54 mm", PackageReference=TO-220, PackageVersion=2011
U2: library part CMP-209535-000001-1, "LDO Voltage Regulators 1A, 3.3V", Dropout Voltage=1.1V, Manufacturer="Advanced Monolithic Systems", Max Junction Temp=+125°C, Max Power Dissipation=1.2W, Max Supply Voltage=15V, Nominal Supply Current=5mA, Output Current=1A, Output Voltage=3.3V, Package=AMS1117, Temperature="-40°C to +125°C", Temperature Range Low=-40°C, Automotive=No, Category=IC, ComponentLink2Description=Datasheet, ComponentLink2URL=http://www.advanced-monolithic.com/pdf/ds1117.pdf, Device Class L1="Integrated Circuits (ICs)", Device Class L2="Power Management ICs", Device Class L3="Voltage Regulators - Linear", Height=1.8mm, Ipc Land Pattern Name=SOT229P700X180-4, Lead Free=Yes, Manufacturer Part Number=AMS1117-3.3, Number Of Outputs=1, Octopart=https://octopart.com/ams1117-3.3-advanced+monolithic+systems-25899300, Output Type=Fixed, RoHS=TRUE, Standoff Height=0.64mm, Temperature Range High=+125°C
U5: library part CMP-0163-00041-1, "512K bits SPI Serial SRAM with SDI and SQI Interface, 2.5 to 5.5 V, 20 MHz, -40 to 85 degC, 8-pin SOIC (SN8), Tube", Manufacturer=Microchip, ComponentLink1Description="Manufacturer URL", ComponentLink1URL=http://www.microchip.com, ComponentLink2Description=Datasheet, ComponentLink2URL=http://ww1.microchip.com/downloads/en/DeviceDoc/25155A.pdf, ComponentLink3Description="Package Specification", ComponentLink3URL=http://www.microchip.com/stellent/groups/techpub_sg/documents/packagingspec/en012702.pdf, ComponentLink4Description="Product URL", ComponentLink4URL=http://www.microchip.com/23LC512, DatasheetVersion="Rev. A", Mounting Technology="Surface Mount", PackageDescription="8-Lead Plastic Small Outline, 4.9 x 3.9 mm Body, 1.27 mm Pitch", PackageReference=SOIC-SN8, PackageVersion=C04-057C, PartNumber=23LC512-I/SN

## Free pads (board coordinates)
  round 1.524 hole 3: 3(42,59) 6(41.943,139.725) 8(123,58) 9(122.852,135.792)

## Via types
v1: diameter 1.27, hole 0.711, Top Layer to Bottom Layer, 87 vias

## Nets (pads, with @x,y where several pads share a name; then routed paths per layer and width w, separated by ;. In a path a pad name is that pad's centre, name@x,y a point inside that pad or via, vN(x,y) a via of type N, cw(c..) or ccw(c..) an arc to the next point about the centre after c; other vN are vias at no path point)
3V3: C1.1 C4.1 C6.1 C10.2 C14.1 CAM1.14 M1.2 P1.8 Q2.2 R2.1 R5.1 R6.1 R7.1 R8.1 R9.1 R10.1 R11.1 R14.1 R16.1 R17.1 R18.1 R19.1 SD1.4 U2.2 U5.8 | length 273.3
  Top Layer w0.381: R11.1 51.05,127.05 53.95,127.05 R10.1 55.851,127 55.951,127.1 ; CAM1.14 56.968,104.968 56.139,104.968 55.172,104 51.223,104 51,104.223 51,115 52,116 60,116 62,118 R16.1 62,123.073 C14.1 R7.1 R8.1 R9.1 55.951,127.1 ; C1.1 C1.1@67,136.2 ; v1(80.111,137.146) 80.111,137.129 79.013,136.031 72.687,136.031 72.646,136.072 71.988,136.072 M1.2 69.605,136.395 69.21,136 67.22,136 67.163,136.057 67.143,136.057 C1.1@67,136.2 ; R19.1 R19.1@93.95,135.15 ; R18.1 94,127.27 92,129.27 92,131 ; P1.8 92.149,141 92,140.851 92,139.286 93.95,137.336 R19.1@93.95,135.15 ; R5.1 102,130.1 102,133 ; U5.8 106.905,125.905 107,126 ; R14.1 104.95,77.85 103,75.9 ; Q2.2 108.65,72.3 C10.2 104.95,72.3 104.747,72.097 104.747,72.047 103,70.3 ; C4.1 111,58.1 111,61 107,65 U2.2 104.639,65 103,66.639 103,70.3 ; C6.1 111.85,134 107.149,134 107,134.149 R2.1 106.975,135 104.975,133 104,133 ; 55.951,127.1 56,127.149 56,129 56.619,129.619 56.619,130.819 SD1.4 56.8,134.8 59.044,137.044 64.384,137.044 64.645,136.784 64.645,135.355 65,135 65.78,135 66.837,136.057 66.857,136.057 C1.1@67,136.2 ; 92,131 v1(92,136) 92.066,135.934 93.016,135.934 93.327,135.623 93.477,135.623 R19.1@93.95,135.15 ; 92,131 R17.1 94.21,131.27 95.94,133 102,133 ; 102,133 104,133 ; 103,70.3 103,75.9 ; 103,75.9 103,85.851 103.149,86 114,86 123,95 123,113.851 122.851,114 107.149,114 107,114.149 107,126 ; 104,133 106.852,130.148 106.877,130.148 107,130.025 R6.1 107,126
  Bottom Layer w0.381: v1(80.111,137.146) 80.111,137.404 80.422,137.714 80.422,137.747 81,138.325 86.985,138.325 88.31,137 91,137 v1(92,136)
5V: C5.1 C400.2 C401.1 P2.1 PS1.4 R1.1 U2.3 | length 294.2
  Top Layer w0.381: P2.1 42,111 v1(44,111) ; v1(48,85) 50,83 C401.1 52.1,78.9 53,78 64,78 ; C400.2 64,78 ; R1.1 101,135.05 101,136.851 101.149,137 106,137 107.574,138.574 107.574,142.32 108.149,142.895 124.105,142.895 126,141 v1(126,136) ; U2.3 104.705,62.609 104.3,62.204 C5.1 104.3,57.95 104.097,57.747 104.047,57.747 102.3,56 84,56 PS1.4 64,76 64,78
  Bottom Layer w0.381: v1(44,111) 48,107 v1(48,85) 52,89 69,89 79.5,78.5 98.5,78.5 101,76 123,76 126,79 v1(126,136)
"CSI D0": CAM1.6 M1.29 | length 55.2
  Top Layer w0.254: CAM1.6 64.02,101 69,105.98 69,112 72.238,115.238 89.238,115.238 91,117 91,125.355 90.415,125.94 88.96,125.94 M1.29
"CSI D1": CAM1.4 M1.30 | length 60.8
  Top Layer w0.254: CAM1.4 65,100 71,106 71,112 73,114 92,114 v1(92.619,114.619) ; M1.30 88.988,127.182 89.802,127.182 89.984,127 v1(91,127)
  Bottom Layer w0.254: v1(91,127) 91,116.238 v1(92.619,114.619)
"CSI D2": CAM1.3 M1.31 | length 66
  Top Layer w0.254: CAM1.3 65.039,99.5 72,106.461 72,112 73,113 93.851,113 94,113.149 v1(94,116) ; M1.31 88.89,129 91,129 92,128 v1(92,124)
  Bottom Layer w0.254: v1(92,124) 92,117 92.984,116.016 93.984,116.016 v1(94,116)
"CSI D3": CAM1.5 M1.33 | length 62.4
  Top Layer w0.254: CAM1.5 64.5,100.5 70,106 70,112 72.857,114.857 90.247,114.857 93,117.61 93,127.539 91.158,129.381 91.149,129.381 89.215,131.315 M1.33
"CSI D4": CAM1.7 M1.4 | length 44.2
  Top Layer w0.254: CAM1.7 62.5,101.5 v1(65,104) ; v1(69,134) 71.52,134 M1.4
  Bottom Layer w0.254: v1(65,104) 65,105.461 67,107.461 67,126 70,129 70,133 v1(69,134)
"CSI D5": CAM1.9 M1.5 | length 40.5
  Top Layer w0.254: CAM1.9 61.5,102.5 v1(63,104) ; v1(68.548,132.378) 71.458,132.378 M1.5
  Bottom Layer w0.254: v1(63,104) 66,107 66,126 68,128 68,132 v1@68.463,132.463
"CSI D6": CAM1.11 M1.6 | length 40.1
  Top Layer w0.254: CAM1.11 60.5,103.5 60.871,103.871 v1(61.129,103.871) ; v1(67,132) 68,131 71.35,131 M1.6
  Bottom Layer w0.254: v1(61.129,103.871) 65,107.743 65,127 67,129 v1(67,132)
"CSI D7": CAM1.13 M1.7 | length 37
  Top Layer w0.254: CAM1.13 v1(59.5,104.5) ; v1(66,130) 71.62,130 M1.7
  Bottom Layer w0.254: v1(59.5,104.5) 60.5,104.5 64,108 64,128 v1(66,130)
"CSI HSYNC": CAM1.16 M1.37 | length 58.7
  Top Layer w0.254: CAM1.16 61.257,106 66.018,110.761 66.018,111.018 70.619,115.619 86.727,115.619 v1(87.554,116.446) ; v1(85.795,135.567) 86.624,136.395 M1.37
  Bottom Layer w0.254: v1(85.795,135.567) 85.795,134.053 85.111,133.368 85.111,125.889 87,124 87,117.275 87.554,116.721 v1(87.554,116.446)
"CSI MCLK": CAM1.12 M1.25 P1.6 R19.2 | length 208.9
  Top Layer w0.254: v1(53,103) 55.384,103 56.361,103.977 56.977,103.977 CAM1.12 ; v1(62,109) 62.257,109 69.257,116 85.851,116 88,118.149 88,120.832 88.323,121.155 M1.25 ; v1(75.138,88.187) 76.951,90 114.187,90 118,93.813 v1(118,112) ; R19.2 96.05,135.15 98,137.1 98,138.851 98.149,139 102.851,139 103,139.149 P1.6
  Bottom Layer w0.254: v1@62,108.889 54.038,108.889 54,108.851 54,104 v1(53,103) 53,96 56.731,92.269 70.731,92.269 v1@75,88 ; P1.6 105,143 119.851,143 120,142.851 120,114 v1(118,112)
"CSI PCLK": C13.1 CAM1.8 M1.36 | length 134.4
  Top Layer w0.254: CAM1.8 56.75,102 56.654,101.904 56.495,101.904 55.591,101 52,101 50,103 ; C13.1 57,124 50,117 50,103 ; M1.36 88.115,135.125 87.792,134.802 87.792,134.708 87.643,134.559 84.441,134.559 83.048,135.952 81.149,135.952 81,136.101 81,138.325 80.851,138.474 71.007,138.474 70.784,138.697 70.784,141.851 70.635,142 39.149,142 39,141.851 39,134.434 38.986,134.42 38.986,111.257 41.243,109 44,109 50,103
"CSI VSYNC": CAM1.18 M1.10 | length 28.5
  Top Layer w0.254: CAM1.18 59,107 60.25,108.25 60.25,109.25 61,110 62,110 v1(68,116) ; v1(69,126) 71.43,126 M1.10
  Bottom Layer w0.254: v1(68,116) 68,125 v1(69,126)
CSI_1.2V: C8.1 C9.1 CAM1.15 U3.2 | length 104.9
  Top Layer w0.254: CAM1.15@57,105.492 62.06,105.492 62.187,105.365 v1(67.128,105.365) ; v1(118,81) 122.65,81 123.95,79.7 C8.1 124.05,79.7 126,77.75 126,70 ; C9.1 122.58,63 122.723,63.143 122.723,63.163 126,66.44 126,70 ; U3.2 125.46,70.54 126,70
  Bottom Layer w0.254: v1(67.128,105.365) 67.128,100.872 79,89 114,89 118,85 v1(118,81)
CSI_2.8V: C2.1 C3.1 CAM1.21 RADJ1.1 U1.2 | length 78.7
  Top Layer w0.254: v1(55,108) 55.194,108.194 55.977,108.194 56.283,108.5 CAM1.21 ; v1(87,82) 89,80 RADJ1.1 90.1,79.73 87,76.63 87,72 ; U1.2 87,67.54 87,72 ; C3.1 92.96,71.74 90.04,71.74 C2.1 87.3,71.7 87,72
  Bottom Layer w0.254: v1(55,108) 55,103.149 55.166,102.982 63.018,102.982 84,82 v1(87,82)
"E32 RST": C7.1 K1.2 M1.3 R6.2 | length 52.2
  Top Layer w0.254: M1.3 83.336,135.125 84.302,134.16 84.84,134.16 v1(86,133) ; R6.2 109,130 ; v1(109,128) 109,130 ; K1.2 111.581,124.181 112,124.181 112,128 111.22,128.78 C7.1 109,130
  Bottom Layer w0.254: v1(86,133) 91,128 v1(109,128)
GND: C1.2 C2.2 C3.2 C4.2 C5.2 C6.2 C7.2 C8.2 C9.2 C10.1 C11.2 C12.2 C13.2 C14.2 C400.1 C401.2 CAM1.10 CAM1.23 CAM1.MP1 CAM1.MP2 K1.1 M1.1 M1.15 M1.38 M1.39 P1.1 P1.5 P2.2 PS1.3 R3.2 R4.2 RADJ2.1 SD1.6 SD1.9 SD1.11 SD1.12 SD1.13 U2.1 U3.1 U5.4 | length 66
  Top Layer w0.254: v1(55,96) CAM1.MP1 ; v1(55,102) 56,103 CAM1.10 ; v1(55,113) 55.851,113 56,112.851 56,111.851 ; CAM1.23 56.977,109.523 56.568,109.523 56,110.091 56,111.851 ; v1@58.508,117.541 58.79,117.823 R3.2 ; CAM1.MP2 58.125,112 56.149,112 56,111.851 ; SD1.11 62.356,143.194 62.806,143.194 v1(63,143) ; v1(62,141) 63,141 66,138 66,137.473 65.685,137.159 v1(65.685,136.884) ; v1@65.692,136.89 65.743,136.942 66.942,136.942 C1.2 ; M1.1 77.016,137.665 v1@77.161,137.52 ; M1.39@77.33,130.165 M1.39@79.165,130.165 ; M1.39@77.33,132 77.33,133.33 78.092,134.092 v1@79.333,134.092 ; M1.39@81,132 82.473,132 v1(83.018,132.545) ; v1(84.84,136.934) 85.115,136.934 85.523,137.342 88.342,137.342 M1.38
  Bottom Layer w0.254: v1(55,96) v1(55,102) ; v1(55,113) 55,115 57.137,117.137 v1(58.089,117.137) ; v1(62,141) 62.984,141.984 62.984,142.984 v1(63,143) ; v1(77.312,137.168) 79.409,135.071 79.409,134.167 v1(79.522,134.055) ; v1(83.018,132.545) 84.84,134.367 v1(84.84,136.934)
"HS2 CLK": M1.13 P2.6 SD1.5 | length 69.6
  Top Layer w0.254: P2.6 43,131 43,135 44.981,136.981 51.493,136.981 53.585,134.889 55.511,134.889 v1(55.7,134.7) SD1.5 ; M1.13 73.15,122.425 73.725,123 v1(74,123)
  Bottom Layer w0.254: v1(55.7,134.7) 57,136 58.5,136 59.341,135.159 60.24,135.159 64.081,139 67.851,139 70.613,136.238 73.762,136.238 78,132 78,123.149 77.851,123 v1(74,123)
"HS2 CMD": M1.23 P2.5 R9.2 SD1.3 | length 76
  Top Layer w0.254: R9.2 57.025,128 57.9,128.875 SD1.3 57.9,133.9 59.871,135.871 v1(59.871,136.048) ; v1(84.024,123.007) 84.024,122.732 84.287,122.469 84.287,120.478 M1.23
  Bottom Layer w0.254: P2.5 44,129 54.851,129 55,129.149 55,134.143 54.811,134.332 54.811,135.068 56.362,136.619 58.544,136.619 58.921,136.242 59.677,136.242 v1(59.871,136.048) ; v1@59.871,136.111 60.111,136.111 63.842,139.842 67.619,139.842 70.842,136.619 74.381,136.619 79.375,131.625 79.375,127.656 v1(84.024,123.007)
"HS2 DATA0": M1.24 P2.7 R10.2 SD1.7 | length 70.4
  Top Layer w0.254: v1(53.99,133.99) 53.5,133.5 SD1.7 53.5,128.375 53.975,127.9 R10.2 ; M1.24 85.932,120.207 v1(85.932,122.932)
  Bottom Layer w0.254: P2.7 51,131 54,134 54,135 56,137 60.148,137 64.148,141 68.851,141 69,140.851 69,139 71,137 75,137 80,132 80,129 85.932,123.068 v1(85.932,122.932)
"HS2 DATA1": M1.26 P2.8 R11.2 SD1.8 | length 78.8
  Top Layer w0.254: R11.2 51,128.95 52.4,130.35 SD1.8 52.4,133.6 v1(52,134) ; v1(83,131) 83,130.795 82.384,130.179 82.384,127.738 87.006,123.117 87.006,122.638 87.154,122.489 88.601,122.489 M1.26 M1.26@88.342,122.102
  Bottom Layer w0.254: P2.8 40,135 42.381,137.381 55.381,137.381 ; v1(52,134) 55.381,137.381 ; v1(83,131) 82.098,131.902 81.565,131.902 80.857,132.609 80.857,135.143 77.526,138.474 70.675,138.474 70,139.149 70,141.851 69.851,142 64.609,142 59.99,137.381 55.381,137.381
"HS2 DATA2": M1.14 P2.3 R7.2 SD1.1 | length 68.3
  Top Layer w0.254: R7.2 61.975,128 61.852,128.123 61.852,128.598 60.1,130.35 SD1.1 60.1,133 v1(62,133) ; M1.14 73.412,121.155 75,122.743 v1(75,124)
  Bottom Layer w0.254: P2.3 40.141,119.141 40.141,120.141 45,125 58.851,125 59,125.149 59,130 v1(62,133) 62.155,132.845 63.016,132.845 63.442,132.419 65.419,132.419 68,135 73,135 73.619,134.381 73.619,129.842 75,128.461 v1(75,124)
"HS2 DATA3": M1.16 P2.4 R8.2 SD1.2 | length 68
  Top Layer w0.254: R8.2 59.975,128 59,128.975 SD1.2 59,133 60,134 v1(61,134) ; M1.16 75.72,121.72 76.984,122.984 76.984,123.984 v1(77,124)
  Bottom Layer w0.254: P2.4 44,126 54.851,126 55,126.149 55,128 v1(61,134) 62.597,135.597 62.597,136.597 64,138 67,138 69.143,135.857 73.143,135.857 74,135 74,130 77,127 v1(77,124)
NetC11_1: C11.1 Q2.3 U1.3 U3.3 | length 43.4
  Top Layer w0.254: v1(112,70.149) 112,72.1 111.673,72.427 111.673,72.627 111.3,73 Q2.3 111.18,73.08 U3.3 121,75.08 C11.1
  Bottom Layer w0.254: U1.3 100.08,65.08 105,70 111.851,70 v1(112,70.149)
NetC12_1: C12.1 CAM1.19 R16.2 | length 40.2
  Top Layer w0.254: v1(53,122) 53,123.78 53.057,123.837 53.057,123.857 53.2,124 C12.1 ; CAM1.19 56.113,107.5 54.614,106 53.149,106 53,106.149 53,114.851 53.149,115 60,115 63,118 R16.2 v1(63,121)
  Bottom Layer w0.254: v1(53,122) 54,121 v1(63,121)
NetCam1_17: CAM1.17 R3.1 | length 23.4
  Top Layer w0.254: v1(52,105) 55,105 56.477,106.477 56.977,106.477 CAM1.17 ; v1(54,119) R3.1
  Bottom Layer w0.254: v1(52,105) 52,117 v1(54,119)
NetF400_1: F400.1 J400.3 | length 31.7
  Top Layer w2: F400.1 -0.675,115.91 -3,113.585 -3,102 1.7,97.3 J400.3
NetF400_2: F400.2 R400.1 R401.2 | length 17.4
  Top Layer w2: R401.2 6,116 F400.2 13.53,116 R400.1
NetJ400_1: J400.1 PS1.2 R401.1 | length 68.9
  Top Layer w2: R401.1 14,104 22,104 26,100 26,97.55 J400.1 25.75,90.05 32.138,83.663 34.337,83.663 44.913,73.087 44.913,70.888 PS1.2
NetLED1_1: LED1.1 M1.9 | length 53
  Top Layer w0.254: M1.9 72.215,127.505 73.72,126 79,126 80,125 v1(80,123) ; LED1.1 94.275,118.275 94.105,118.105 94.105,117.895 94.984,117.016 95.984,117.016 v1(96,117)
  Bottom Layer w0.254: v1(80,123) 81,122 83,122 85,120 85,113.149 85.149,113 87.851,113 88.443,113.592 88.443,116.814 88.111,117.146 88.111,118.368 88.743,119 89,119 89.111,118.889 89.368,118.889 90,118.257 90,113.149 90.149,113 94,113 96,115 v1(96,117)
NetLED1_2: LED1.2 R4.1 | length 4.7
  Top Layer w0.254: R4.1 94.1,120.725 95.725,119.1 LED1.2
NetM1_8: M1.8 R15.2 | length 84
  Top Layer w0.254: M1.8 73.225,128.775 v1(74,128) ; v1(73,101) 73,84.149 73.149,84 v1(96,84) ; v1(105,84) 105.21,83.79 R15.2
  Bottom Layer w0.254: v1(73,101) 72,102 72,127.851 72.149,128 v1(74,128) ; v1(96,84) v1(105,84)
NetM1_17: M1.17 U5.7 | length 52
  Top Layer w0.254: M1.17 76.99,118.01 v1(77,118) ; U5.7 105.15,124.635 106,123.785 v1(106,112)
  Bottom Layer w0.254: v1(77,118) 77,112 78.381,110.619 104.619,110.619 v1(106,112)
NetM1_18: M1.18 U5.3 | length 42.5
  Top Layer w0.254: M1.18 78.26,118.74 v1@79,118 ; v1(99,112) 99,118 98,119 98,123 98.299,123.299 99.509,123.299 U5.3
  Bottom Layer w0.254: v1(78.935,118.085) 78.935,112.065 80,111 98,111 v1(99,112)
NetM1_21: M1.21 U5.2 | length 41
  Top Layer w0.254: v1@81,118 81.747,118.747 81.747,119.832 M1.21 ; v1(97,113) 97,115.75 98,116.75 98,118 97,119 97,124 98,125 98.391,125 98.756,124.635 U5.2
  Bottom Layer w0.254: v1(80.761,117.871) 80.955,117.676 80.955,117.259 81,117.214 81,112 81.57,111.43 96.43,111.43 96.984,111.984 96.984,112.984 v1(97,113)
NetM1_22: M1.22 U5.5 | length 41.8
  Top Layer w0.254: v1@83,118 83.017,118.017 83.017,119.832 M1.22 ; v1(103,112) 103.827,112.827 103.827,121.935 103.987,122.095 U5.5
  Bottom Layer w0.254: v1(82.787,117.939) 82.787,112.213 83,112 94.539,112 96.92,114.381 100.619,114.381 v1@103.381,111.619
NetM1_28: M1.28 U5.6 | length 37.9
  Top Layer w0.254: M1.28 89.215,124.965 90,124.18 90,119 v1(89,118) ; v1(102,115) 102,123 102.365,123.365 U5.6
  Bottom Layer w0.254: v1(89,118) 89,113.381 90,112.381 94.381,112.381 97,115 v1(102,115)
NetP1_4: P1.4 R1.2 R2.2 | length 13.9
  Top Layer w0.254: R1.2 102.025,135 103.075,136.05 109,136.05 ; R2.2 107.975,135 108.173,135.198 108.173,135.223 109,136.05 ; P1.4 109,136.05
NetPS1_1: PS1.1 R400.2 | length 53.2
  Top Layer w2: R400.2 34.47,88.53 38.677,84.323 41.677,84.323 47.093,78.907 47.093,75.907 51.3,71.7 PS1.1
NetQ2_1: Q2.1 R14.2 R15.1 | length 8
  Top Layer w0.254: R15.1 107,78.05 R14.2 107.05,75.8 108.327,74.523 108.327,74.323 108.7,73.95 Q2.1
NetR5_2: R5.2 U5.1 | length 4.9
  Top Layer w0.254: U5.1 100.013,125.905 100.173,126.065 100.173,127.448 101,128.275 R5.2
NetRADJ1_2: RADJ1.2 RADJ2.2 U1.1 | length 28.5
  Top Layer w0.254: RADJ1.2 91.89,79.73 95,76.62 95,72.9 ; U1.1 94.851,60 95,60.149 95,72.9 ; RADJ2.2 92.05,75.85 95,72.9
"TWI SCK": CAM1.20 M1.12 R18.2 | length 151.4
  Top Layer w0.254: CAM1.20 57.031,108.031 58.489,108.031 66.508,116.05 66.508,121.79 68.413,123.695 69.695,123.695 ; v1(69,121) 69,123 69.695,123.695 ; M1.12 69.695,123.695 ; R18.2 96.551,127 97.198,126.353 v1(97.251,126.353)
  Bottom Layer w0.254: v1(69,121) 69,100.141 77.141,92 113,92 115.737,94.737 115.737,126.428 115.588,126.577 v1@97.423,126.577
"TWI SDA": CAM1.22 M1.11 R17.2 | length 183.8
  Top Layer w0.254: v1(55,110) 56,109 CAM1.22 57.031,109.031 58.77,109.031 66,116.261 66,122 68.965,124.965 M1.11 ; v1(75,86) 94.743,86 96.548,87.806 113.806,87.806 121,95 v1(121,112) ; R17.2 v1(98,131) ; v1(118,131) v1(122,131)
  Bottom Layer w0.254: v1(55,110) 53.149,110 52.889,109.74 52.889,104.632 52,103.743 52,94 55,91 70,91 v1(75,86) ; v1(98,131) v1(118,131) ; v1(121,112) 121.016,112.016 121.016,113.016 122,114 v1(122,131)
U0RXD: M1.34 P1.3 | length 29.6
  Top Layer w0.254: M1.34 90.415,132.585 v1(91,132)
  Bottom Layer w0.254: v1(91,132) 107,132 112,137 P1.3
U0TXD: M1.35 P1.2 | length 33
  Top Layer w0.254: M1.35 90.855,133.855 v1(91,134)
  Bottom Layer w0.254: v1(91,134) 108,134 111,137 111,139.486 110.986,139.5 110.986,141.851 111.149,142.014 113.986,142.014 P1.2
U2RXD: M1.27 P1.7 | length 37
  Top Layer w0.254: v1(83,134) 84.889,132.111 85.74,132.111 86,131.851 86,125.81 88.115,123.695 M1.27 ; v1(83,137) 84.474,138.474 89.323,138.474 91,140.151 91,141.851 91.163,142.014 98.986,142.014 P1.7
  Bottom Layer w0.254: v1(83,134) v1(83,137)
pads on no net: CAM1.1 CAM1.2 CAM1.24 J400. J400.2 M1.19 M1.20 M1.32 P1.MH1 P1.MH2 P2.MH1 P2.MH2 SD1.10 U2.4

## Polygon pours and split planes (outlines as drawn)
GND on Top Layer "GND_L01_P000" (solid, pour order 0): 127,144 127,54 55,54 55,75 44,86 44,101 37,108 37,144

## Other copper
Multi-Layer:
  pour cut-out: 76,110 114,110 114,93 76,93

## Dimensions
-6,120 to -6,78 on Top Layer
128,145 to 128,53 on Top Layer
36,145 to 128,145 on Top Layer
-6,120 to 36,119 on Top Layer